# Altium PCB TH255A_MG32F003_TSSOP20_QFN20_EV_V10.PcbDoc (part 1 of 2)
Units mil, origin at the board's own origin, x right, y up, seen from the top; angles counter-clockwise.
Board outline 4094.49 x 2637.8 mil, 2 copper layers (Top Layer, Bottom Layer); 121 components, 89 nets, 513 pads, 230 vias.
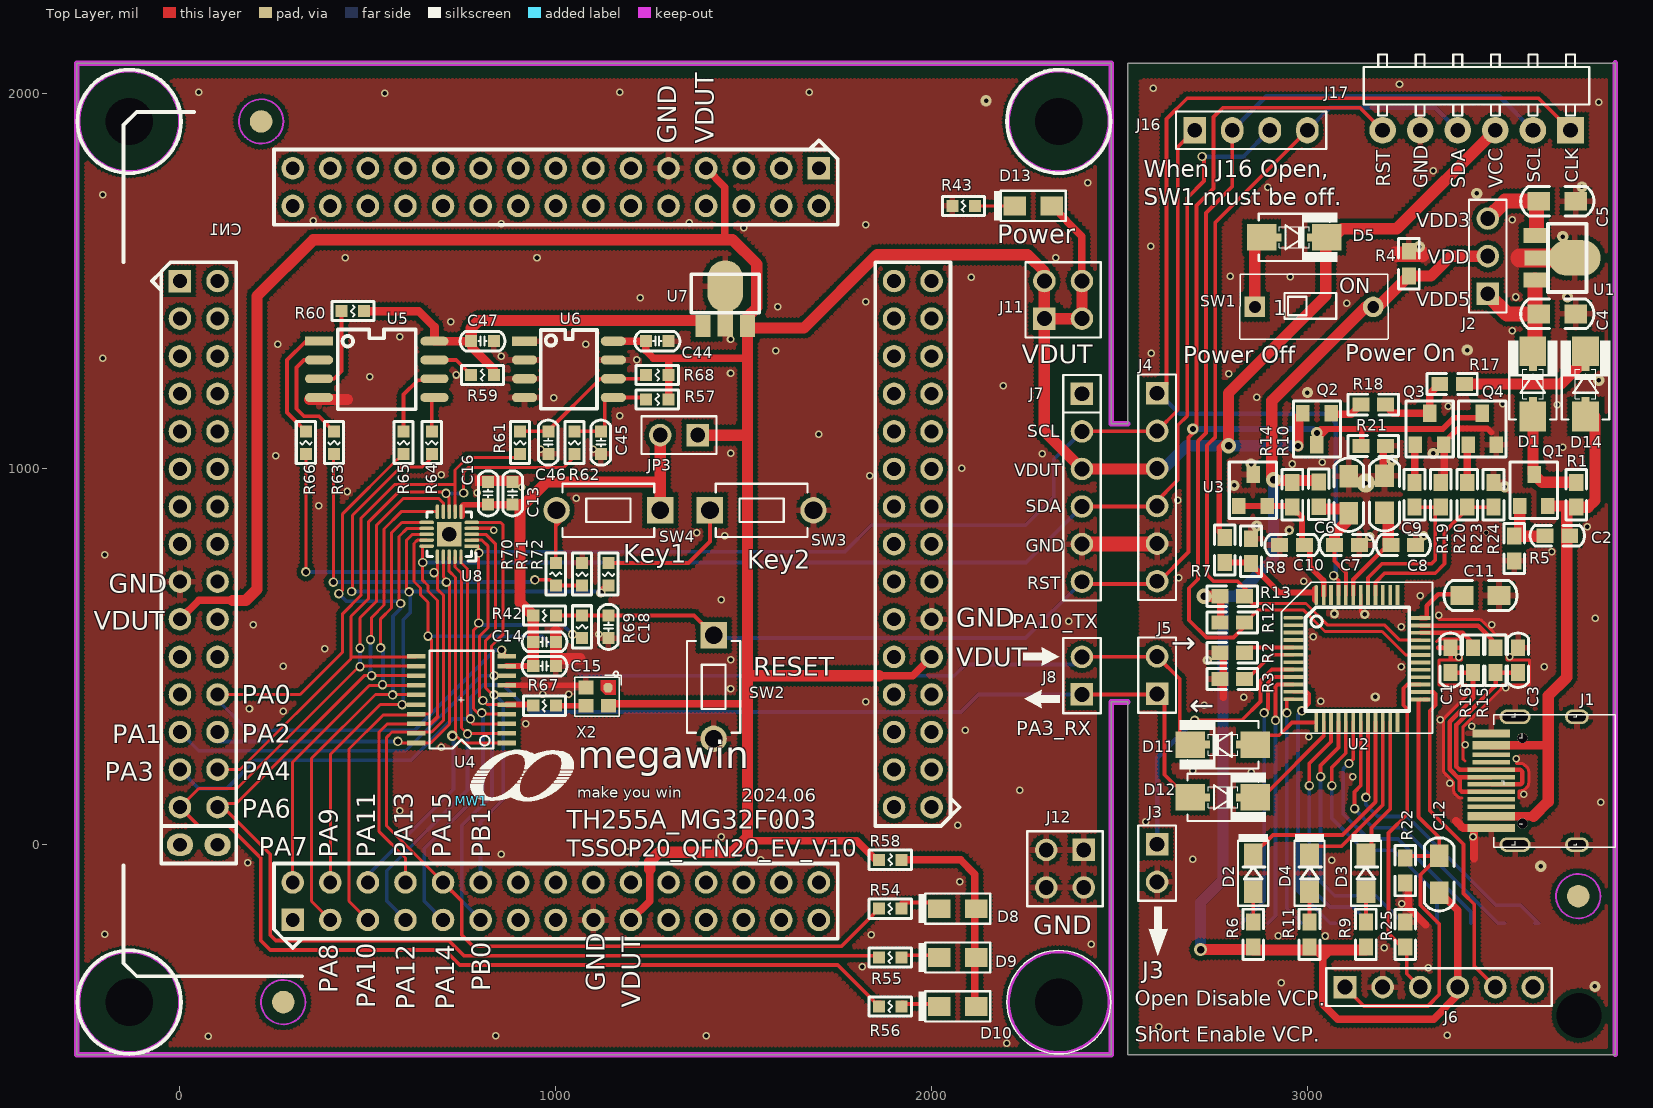
[diagram p0: Top Layer view]
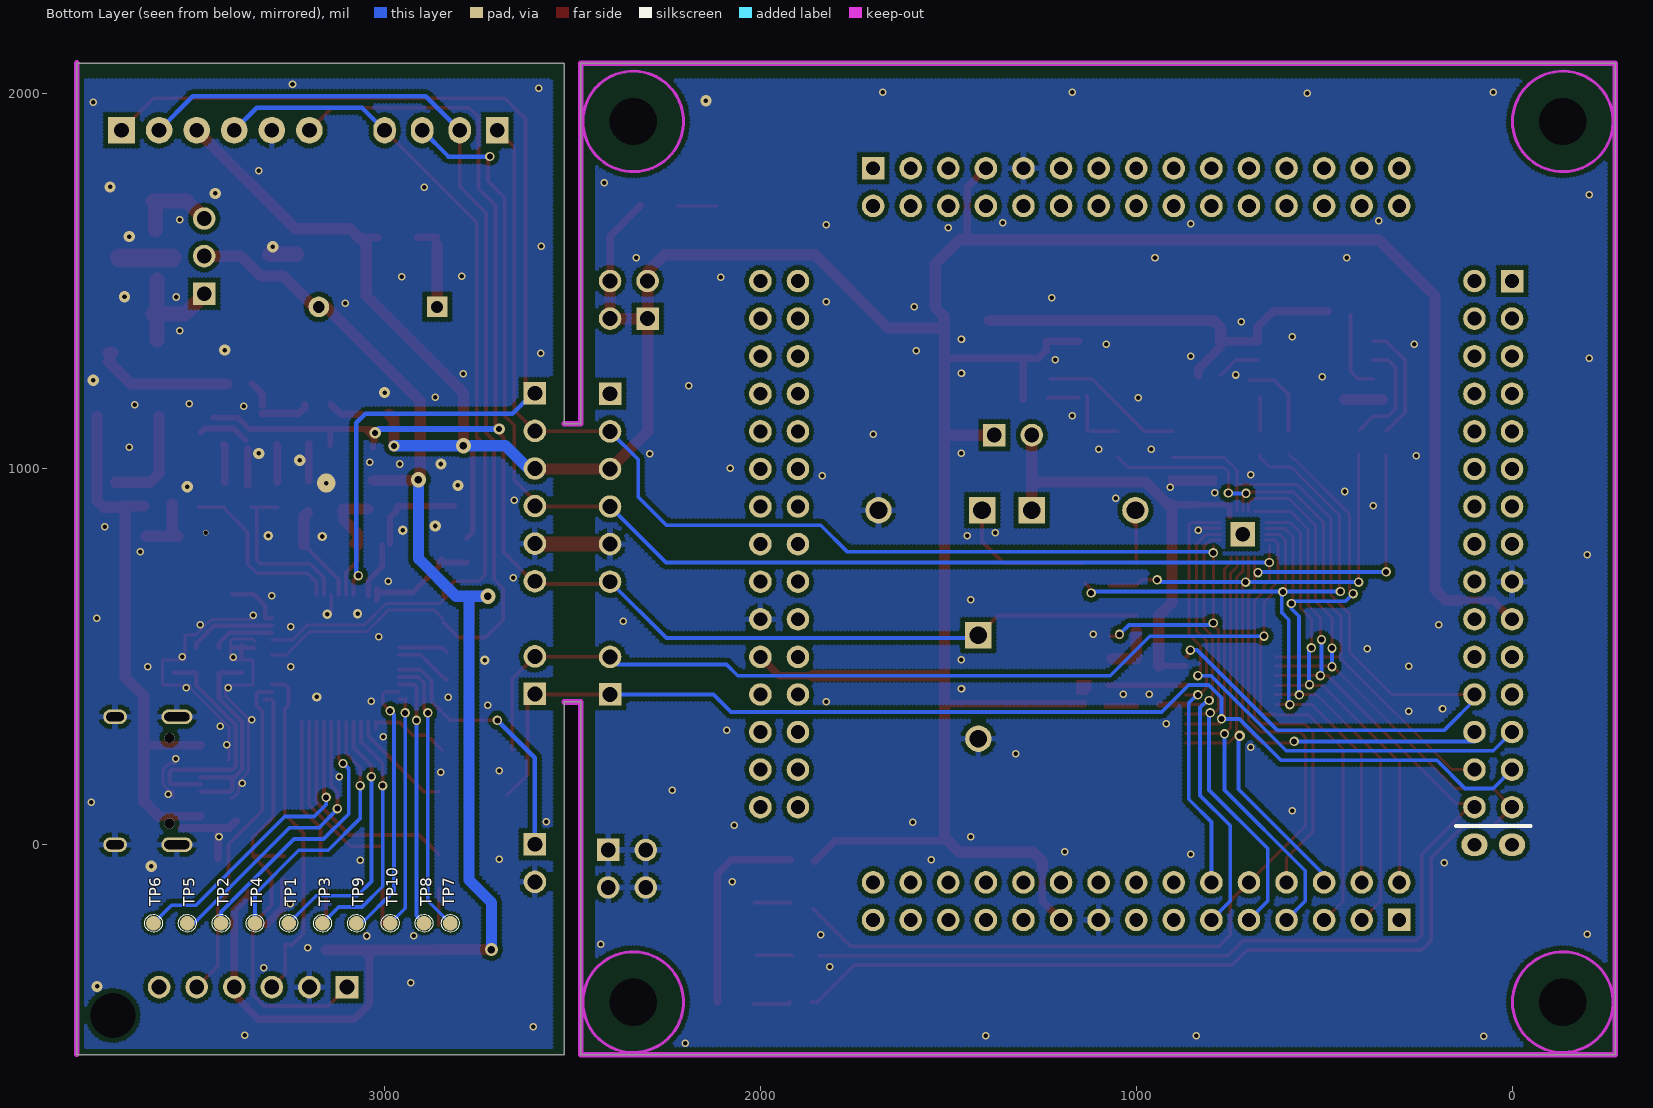
[diagram p1: Bottom Layer view, seen from below]

## Layer stack, top to bottom
Top Layer: signal copper 1.4
Dielectric: dielectric 12.6, FR-4, Dk 4.8
Bottom Layer: signal copper 1.4

## Board outline
-275.04,-558.74 -275.04,2079.06 2478.35,2079.06 2478.35,1120 2521.65,1120 2521.65,2079.06 3819.45,2079.06 3819.45,-558.74 2521.65,-558.74 2521.65,380 2478.35,380 2478.35,-558.74

## Design rules (kind name [scope] priority, off if disabled: settings)
Clearance 12 [All] p1 off: gap=12
Clearance 7 [All] p2 off: gap=7
Clearance 6 [All] p3: gap=6
HoleSize 500-HoleSize [All] p1: absolutevalues=TRUE maxlimit=1500 minlimit=1 maxpercent=80.000 minpercent=20.000
PolygonConnect VIA [ISVIA] p1: connectstyle=Direct reliefconductorwidth=10 reliefentries=4 polygonreliefangle="90 Angle"
PolygonConnect "15 PolygonConnect" [All] p2: connectstyle=Relief reliefconductorwidth=15 reliefentries=4 polygonreliefangle="90 Angle"
RoomDefinition "3_MG32F003_QFN20 " [InComponentClass('3_MG32F003_QFN20 ')] p1: confinementstyle=ConfineIn formatcopy=TRUE lockcomponents=FALSE outline -346,-819 3733,-819 3733,2359 -346,2359
RoomDefinition 2_MG32F003_TSSOP20 [InComponentClass('2_MG32F003_TSSOP20')] p2: confinementstyle=ConfineIn formatcopy=TRUE lockcomponents=FALSE outline -465.04,-733.74 3965,-733.74 3965,2151.26 -465.04,2151.26
RoomDefinition 1_MLink_V13 [InComponentClass('1_MLink_V13')] p3: confinementstyle=ConfineIn formatcopy=TRUE lockcomponents=FALSE outline -385.04,-778.74 3904.96,-778.74 3904.96,2216.26 -385.04,2216.26
RoutingVias [All] p1: holewidth=16 width=25 viastyle="Through Hole" minholewidth=12 minwidth=25 maxholewidth=28 maxwidth=50
ShortCircuit [All] p1 off: allowed=FALSE
SilkscreenOverComponentPads [All] p1: minsilkscreentomaskgap=10
SolderMaskExpansion [All] p1: expansion=4
UnRoutedNet [All] p1 off:
Width [All] p1: maxlimit=100 minlimit=6 preferedwidth=8
24 further rules are at their usual default settings.

## Classes and differential pairs
component class "3_MG32F003_QFN20 ": C13 C16 U8
component class 1_MLink_V13: C1 C2 C3 C4 C5 C6 C7 C8 C9 C10 C11 C12 D1 D2 D3 D4 D5 D11 D12 D14 J1 J2 J3 J4 J5 J6 J16 J17 MW1 Q1 Q2 Q3 Q4 R1 R2 R3 R4 R5 R6 R7 R8 R9 R10 R11 R12 R13 R14 R15 R16 R17 R18 R19 R20 R21 R22 R23 R24 R25 SW1 TP1 TP2 TP3 TP4 TP5 TP6 TP7 TP8 TP9 TP10 U1 U2 U3
component class 2_MG32F003_TSSOP20: C14 C15 C18 C44 C45 C46 C47 CN1 D8 D9 D10 D13 J7 J8 J11 J12 JP3 R42 R43 R54 R55 R56 R57 R58 R59 R60 R61 R62 R63 R64 R65 R66 R67 R68 R69 R70 R71 R72 SW2 SW3 SW4 U4 U5 U6 U7 X2

## Components (designator, comment, footprint, x,y, rotation, side; value= is the part's Value field where it differs from the comment)
C1 "15pF" 0603C 3380.55,491.26 r270 top
C2 "0.1uF" 0603C 3664.96,822.52 r0 top
C3 "15pF" 0603C 3560.55,491.26 r270 top
C4 "4.7uF" 0805C 3664.96,1412.52 r0 top
C5 "4.7uF" 0805C 3664.96,1712.52 r0 top
C6 "4.7uF" 0805C 3109.96,931.26 r90 top
C7 "0.1uF" 0603C 3105,797.52 r0 top
C8 "0.1uF" 0603C 3255,797.52 r0 top
C9 "4.7uF" 0805C 3204.96,932.52 r90 top
C10 "0.1uF" 0603C 2959.05,797.52 r0 top
C11 "4.7uF" 0805C 3460.55,663.16 r0 top
C12 "4.7uF" 0805C 3350.55,-78.74 r90 top
C13 "10uF" C-0603 885,935 r90 top
C14 "10uF" C-0603 970,540 r0 top
C15 "0.1uF" C-0603 970,475.6 r0 top
C16 "0.1uF" C-0603 820,935 r90 top
C18 "NC" C-0603 1140,580 r90 top
C44 "0.1uF" C-0603 1270,1340 r0 top
C45 "47pF" C-0603 1120,1070 r270 top
C46 "47pF" C-0603 980,1070 r270 top
C47 "0.1uF" C-0603 805,1340 r0 top
CN1 "QFP122-CKT" QFP122-P2.54-CKT 1000,800 r0 top locked
D1 "1N5817" DIODE_SMA_SOD323 3599.96,1226.26 r90 top
D2 "Yellow" 0805D 2855.55,-75.48 r90 top
D3 "Green" 0805D 3155.55,-75.48 r90 top
D4 "Red" 0805D 3005.55,-75.48 r90 top
D5 "1N5817" DIODE_SMA_SOD323 2964.96,1616.26 r0 top
D8 "Red" 0805D 2069.21,-170 r180 top
D9 "Yellow" 0805D 2069.21,-300 r180 top
D10 "Green" 0805D 2069.21,-430 r180 top
D11 "1N5817" DIODE_SMA_SOD323 2775,266.26 r180 top
D12 "1N5817" DIODE_SMA_SOD323 2775,126.26 r0 top
D13 "Yellow" 0805D 2270,1700 r180 top
D14 "1N5817" DIODE_SMA_SOD323 3739.96,1226.26 r90 top
J1 "CJ-USB3-C16P" USB_CF_16_SMD 3524.24,170.38 r90 top
J2 "2&3 (0 ohm)" PS3P254 3480,1466.26 r90 top
J3 "VCP Option" PS2P254 2600,1.26 r270 top
J4 "OnBoard ICP/SWD Connector" PS6P254 2600,1201.26 r270 top
J5 "NC" PS2P254 2600,401.26 r90 top
J6 "CON6" PS6P254 3100,-378.74 r0 top
J7 "CON6" PS6P254 2400,1200 r270 top locked
J8 "NC" PS2P254 2400,400 r90 top
J11 "CONN SOCKET 2x2/SM" PS2X2P254 2300,1400 r0 top
J12 "CONN SOCKET 2x2/SM" PS2X2P254 2404.96,-13.74 r180 top
J16 "When J16 Open, SW1 must be off." PS4P254 2700,1901.26 r0 top
J17 "Off Board ICP/SWD Connector" PS6P254_90 3700,1901.26 r180 top
JP3 "JUMPER" PS2P254 1377.79,1090 r180 top
MW1 "MW-A4" MEGAWIN_3.4_1 776.1,116.1 r0 top
Q1 "IRLML6402" SOT23 3602.5,943.23 r0 top
Q2 "2N3906" SOT23 3025.46,1106.26 r180 top
Q3 "3904" SOT23_132 3325,1106.26 r0 top
Q4 "3904" SOT23_132 3465,1106.26 r0 top
R1 "NC" 0603R 3715,931.26 r270 top
R2 "0" 0603R 2800,511.26 r0 top
R3 "NC" 0603R 2800,441.26 r0 top
R4 "3.3K" 0603R 3270,1546.26 r270 top
R5 "1M" 0603R 3550,788.26 r270 top
R6 "1K" 0603R 2855.55,-238.48 r270 top
R7 "30K" 0603R 2780,784.26 r90 top
R8 "10K" 0603R 2850,781.26 r270 top
R9 "1K" 0603R 3155.55,-238.48 r270 top
R10 "10" 0603R 3029.96,932.52 r90 top
R11 "1K" 0603R 3005.55,-238.48 r270 top
R12 "1.5K" 0603R 2800,591.26 r180 top
R13 "1.5K" 0603R 2800,661.26 r180 top
R14 "1K" 0603R 2959.96,931.26 r270 top
R15 "30" 0603R 3500.55,491.26 r90 top
R16 "30" 0603R 3440.55,491.26 r90 top
R17 "4.7K" 0603R 3384.96,1226.26 r0 top
R18 "1K" 0603R 3175,1171.26 r0 top
R19 "4.7K" 0603R 3285,931.26 r270 top
R20 "10K" 0603R 3355,931.26 r270 top
R21 "1M" 0603R 3175,1061.26 r180 top
R22 "47K" 0603R 3260.55,-68.74 r270 top
R23 "4.7K" 0603R 3425,931.26 r270 top
R24 "10K" 0603R 3495,931.26 r270 top
R25 "47K" 0603R 3260.55,-238.74 r270 top
R42 "47K" R-0603 970,610 r0 top
R43 "1K" R-0603 2085,1700 r0 top
R54 "470" R-0603 1890,-170 r0 top
R55 "470" R-0603 1890,-300 r0 top
R56 "470" R-0603 1890,-430 r0 top
R57 "10K" R-0603 1270,1185 r180 top
R58 "0" R-0603 1890,-40 r180 top
R59 "10K" R-0603 805,1250 r0 top
R60 "10K" R-0603 460,1420 r180 top
R61 "NC" R-0603 905,1070 r90 top
R62 "NC" R-0603 1050,1070 r90 top
R63 "NC" R-0603 410,1070 r90 top
R64 "NC" R-0603 670,1070 r90 top
R65 "NC" R-0603 595,1070 r90 top
R66 "NC" R-0603 335,1070 r90 top
R67 "NC" R-0603 970,370 r0 top
R68 "10K" R-0603 1270,1250 r180 top
R69 "NC" R-0603 1070,580 r90 top
R70 "-" R-0603 1000,720 r270 top
R71 "-" R-0603 1070,720 r90 top
R72 "-" R-0603 1140,720 r90 top
SW1 "SW KEY-SPST" DIP2_SW 2860.04,1431.26 r0 top
SW2 "SW TACT-SPST" SW_T_2P 1420,420 r270 top
SW3 "Key2" SW_T_2P 1547.79,890 r0 top
SW4 "Key1" SW_T_2P 1140,890 r180 top
TP1 "T POINT A" PIN1_1H0 3255,-208.74 r90 bottom
TP2 "T POINT A" PIN1_1H0 3435,-208.74 r90 bottom
TP3 "T POINT A" PIN1_1H0 3165,-208.74 r180 bottom
TP4 "T POINT A" PIN1_1H0 3345,-208.74 r180 bottom
TP5 "T POINT A" PIN1_1H0 3525,-208.74 r180 bottom
TP6 "T POINT A" PIN1_1H0 3615,-208.74 r180 bottom
TP7 "T POINT A" PIN1_1H0 2825,-208.74 r180 bottom
TP8 "T POINT A" PIN1_1H0 2895,-208.74 r180 bottom
TP9 "T POINT A" PIN1_1H0 3075,-208.74 r180 bottom
TP10 "T POINT A" PIN1_1H0 2985,-208.74 r90 bottom
U1 "AIC1734-33(SOT-89)" SOT89 3604.96,1561.57 r270 top
U2 "MG84FG516_LQFP48" LQFP48_7X7_050 3131.47,495.65 r270 top
U3 "TL431A" SOT23 2854.96,943.23 r0 top
U4 "MG32F003_TSSOP20" TSSOP20_170P065 869,270.8 r90 top locked
U5 "MX25L3206E" SO8_208P127 523.54,1265 r270 top
U6 "24C16-SOP8" SO8_150P127 916.89,1340 r0 top
U7 "AIC1734-33(SOT-89)" SOT89 1450.94,1380 r0 top
U8 "MG32F003_QFN20  3x3P0.4mm" QFN20_3X3P040_1 716.37,826.22 r90 top
X2 "OT20168MJBA4SL" OSC_2.0X1.6_SMD 1110,394.19 r180 top

## Footprints (in the part's own frame and the unit in brackets; to place one, negate y for a bottom-side part, rotate by r counter-clockwise, add the part's x,y. Pads: shape width x height; smd on the part's side, far side on the other; paste and mask are expansions set on the pad)
0603C [mil]
  rect 45x38 smd: 1(33,0) 2(-33,0)
  silkscreen extent -72,-28 72,28
0603R [mil]
  rect 45x38 smd: 1(33,0) 2(-33,0)
  silkscreen extent -67,-28 67,28
0805C [mil]
  rect 60x50 smd: 1(-49.21,0) 2(49.21,0)
  silkscreen extent -97,-39 97,39
0805D [mil]
  rect 60x50 smd: 1(-49.21,0) 2(49.21,0)
  silkscreen extent -87,-40 104,40
C-0603 [mil]
  rect 32x32 smd: 1(-30,0) 2(30,0)
  silkscreen extent -60,-26 60,26
DIODE_SMA_SOD323 [mm]
  rect 2x1.8 smd: 1(-2.2,0) 2(2.2,0)
  rect 0.95x0.54 smd: 1(-1.35,0) 2(1.35,0)
  silkscreen extent -2.4,-1.68 2.92,1.68
DIP2_SW [mm]
  rect 1.4x1.4 hole 0.8: 1(0,0)
  round 1.4 hole 0.8: 2(8,0)
  silkscreen extent -1.02,-2.2 9.02,2.2
LQFP48_7X7_050 [mm]
  oval 0.254x1.35 smd: 1(-2.75,-4.292)
  rect 0.254x1.35 smd: 2(-2.25,-4.292) 3(-1.75,-4.292) 4(-1.25,-4.292) 5(-0.75,-4.292) 6(-0.25,-4.292) 7(0.25,-4.292) 8(0.75,-4.292) 9(1.25,-4.292) 10(1.75,-4.292) 11(2.25,-4.292) 12(2.75,-4.292) 25(2.763,4.292) 26(2.263,4.292) 27(1.763,4.292) 28(1.263,4.292) 29(0.763,4.292) 30(0.263,4.292) 31(-0.237,4.292) 32(-0.737,4.292) 33(-1.237,4.292) 34(-1.737,4.292) 35(-2.237,4.292) 36(-2.737,4.292)
  rect 1.35x0.254 smd: 13(4.286,-2.744) 14(4.286,-2.244) 15(4.286,-1.744) 16(4.286,-1.244) 17(4.286,-0.744) 18(4.286,-0.244) 19(4.286,0.256) 20(4.286,0.756) 21(4.286,1.256) 22(4.286,1.756) 23(4.286,2.256) 24(4.286,2.756) 37(-4.286,2.756) 38(-4.286,2.256) 39(-4.286,1.756) 40(-4.286,1.256) 41(-4.286,0.756) 42(-4.286,0.256) 43(-4.286,-0.244) 44(-4.286,-0.744) 45(-4.286,-1.244) 46(-4.286,-1.744) 47(-4.286,-2.244)
  oval 1.35x0.254 smd: 48(-4.286,-2.744)
  silkscreen extent -5.15,-5.09 5.05,5.11
MEGAWIN_3.4_1 [mil]
  silkscreen extent -2,0 272,135
OSC_2.0X1.6_SMD [mil]
  oct 25x25 smd: 1(-29,-24)
  rect 40x37 smd: 2(30,-24.19) 3(30,24.19) 4(-30,24.19)
  Top Layer region: -50,-43 -50,-5 -21,-5 -9,-17 -9,-43
  silkscreen extent -64,-67 60,52
PIN1_1H0 [mm]
  round 1 smd: 1(0,0)
  silkscreen extent -0.6,-0.6 0.6,0.6
PS2P254 [mil]
  rect 60x60 hole 39.37: 1(0,0)
  round 60 hole 39.37: 2(100,0)
  silkscreen extent -50,-50 150,50
PS2X2P254 [mil]
  rect 60x60 hole 39.37: 1(0,0)
  round 60 hole 39.37: 2(0,100) 3(100,0) 4(100,100)
  silkscreen extent -50,-50 150,150
PS3P254 [mil]
  rect 60x60 hole 39.37: 1(0,0)
  round 60 hole 39.37: 2(100,0) 3(200,0)
  silkscreen extent -50,-50 250,50
PS4P254 [mil]
  rect 60x70 hole 39.37: 1(0,0)
  oval 60x70 hole 39.37: 2(100,0) 3(200,0) 4(300,0)
  silkscreen extent -50,-50 350,50
PS6P254 [mil]
  rect 60x60 hole 39.37: 1(0,0)
  round 60 hole 39.37: 2(100,0) 3(200,0) 4(300,0) 5(400,0) 6(500,0)
  silkscreen extent -50,-50 550,50
PS6P254_90 [mm]
  rect 1.8x1.8 hole 1: 1(0,0)
  round 1.8 hole 1: 2(2.54,0) 3(5.08,0) 4(7.62,0) 5(10.16,0) 6(12.7,0)
  silkscreen extent -1.27,-5.11 13.97,-1
QFN20_3X3P040_1 [mil]
  rect 64.96x64.96 hole 39.37: 0(0,0)
  rect 9x39.37 smd: 1(-31.5,-60)
  oval 9x39.37 smd: 2(-15.75,-60) 3(0,-60) 4(15.75,-60) 5(31.5,-60) 11(31.5,60) 12(15.75,60) 13(0,60) 14(-15.75,60) 15(-31.5,60)
  oval 39.37x9 smd: 6(60,-31.5) 7(60,-15.75) 8(60,0) 9(60,15.75) 10(60,31.5) 16(-60,31.5) 17(-60,15.75) 18(-60,0) 19(-60,-15.75) 20(-60,-31.5)
  silkscreen extent -71,-71 59,59
QFP122-P2.54-CKT [mil]
  rect 60x60 hole 37: 1(-700,-1000) 61(700,1000) 91(-1000,700)
  round 60 hole 37: 2(-700,-900) 3(-600,-1000) 4(-600,-900) 5(-500,-1000) 6(-500,-900) 7(-400,-1000) 8(-400,-900) 9(-300,-1000) 10(-300,-900) 11(-200,-1000) 12(-200,-900) 13(-100,-1000) 14(-100,-900) 15(0,-1000) 16(0,-900) 17(100,-1000) 18(100,-900) 19(200,-1000) 20(200,-900) 21(300,-1000) 22(300,-900) 23(400,-1000) 24(400,-900) 25(500,-1000) 26(500,-900) 27(600,-1000) 28(600,-900) 29(700,-1000) 30(700,-900) 31(1000,-700) 32(900,-700) 33(1000,-600) 34(900,-600) 35(1000,-500) 36(900,-500) 37(1000,-400) 38(900,-400) 39(1000,-300) 40(900,-300) 41(1000,-200) 42(900,-200) 43(1000,-100) 44(900,-100) 45(1000,0) 46(900,0) 47(1000,100) 48(900,100) 49(1000,200) 50(900,200) 51(1000,300) 52(900,300) 53(1000,400) 54(900,400) 55(1000,500) 56(900,500) 57(1000,600) 58(900,600) 59(1000,700) 60(900,700) 62(700,900) 63(600,1000) 64(600,900) 65(500,1000) 66(500,900) 67(400,1000) 68(400,900) 69(300,1000) 70(300,900) 71(200,1000) 72(200,900) 73(100,1000) 74(100,900) 75(0,1000) 76(0,900) 77(-100,1000) 78(-100,900) 79(-200,1000) 80(-200,900) 81(-300,1000) 82(-300,900) 83(-400,1000) 84(-400,900) 85(-500,1000) 86(-500,900) 87(-600,1000) 88(-600,900) 89(-700,1000) 90(-700,900) 92(-900,700) 93(-1000,600) 94(-900,600) 95(-1000,500) 96(-900,500) 97(-1000,400) 98(-900,400) 99(-1000,300) 100(-900,300) 101(-1000,200) 102(-900,200) 103(-1000,100) 104(-900,100) 105(-1000,0) 106(-900,0) 107(-1000,-100) 108(-900,-100) 109(-1000,-200) 110(-900,-200) 111(-1000,-300) 112(-900,-300) 113(-1000,-400) 114(-900,-400) 115(-1000,-500) 116(-900,-500) 117(-1000,-600) 118(-900,-600) 119(-1000,-700) 120(-900,-700)
  oval 70x60 hole 37: 121(-1000,-800) 122(-900,-800)
  silkscreen extent -1150,-1150 1075,1150
R-0603 [mil]
  rect 32x32 smd: 1(-30,0) 2(30,0)
  silkscreen extent -56,-26 56,26
SO8_150P127 [mil]
  rect 67x25 smd: 1(0,0)
  oval 67x25 smd: 2(0,-50) 3(0,-100) 4(0,-150) 5(236.22,-150) 6(236.22,-100) 7(236.22,-50) 8(236.22,0)
  silkscreen extent 43,-180 193,30
SO8_208P127 [mm]
  rect 0.6x1.9 smd: 1(-1.905,-3.9)
  oval 0.6x1.9 smd: 2(-0.635,-3.9) 3(0.635,-3.9) 4(1.905,-3.9) 5(1.905,3.9) 6(0.635,3.9) 7(-0.635,3.9) 8(-1.905,3.9)
  silkscreen extent -2.69,-2.63 2.69,2.63
SOT23 [mil]
  rect 36x43.31 smd: 1(-37.5,-41.97) 2(37.5,-41.97)
  rect 36x46.06 smd: 3(0.5,41.97)
  silkscreen extent -63,-74 63,75
SOT23_132 [mil]
  rect 36x43.31 smd: 1(-37.5,-41.97) 3(37.5,-41.97)
  rect 36x46.06 smd: 2(0.5,41.97)
  silkscreen extent -63,-74 63,75
SOT89 [mm]
  rect 1.016x1.5 smd: 1(-1.5,0) 3(1.5,0)
  oval 2.4x3.5 smd: 2(0,2.7)
  rect 1.016x2.6 smd: 2(0,0.6)
  silkscreen extent -2.3,0.9 2.3,3.5
SW_T_2P [mil]
  rect 70x70 hole 47.24: 1(-137.79,0)
  round 70 hole 47.24: 2(137.8,0)
  silkscreen extent -122,-71 122,71
TSSOP20_170P065 [mil]
  rect 12x49 smd: 1(0,0) 2(25.6,0) 3(51.2,0) 4(76.8,0) 5(102.4,0) 6(128,0) 7(153.6,0) 8(179.2,0) 9(204.8,0) 10(230.4,0) 11(230.4,240.16) 12(204.8,240.16) 13(179.2,240.16) 14(153.6,240.16) 15(128,240.16) 16(102.4,240.16) 17(76.8,240.16) 18(51.2,240.16) 19(25.6,240.16) 20(0,240.16)
  silkscreen extent -15,35 245,205
USB_CF_16_SMD [mm]
  rect 0.55x3.2 smd: A1(-3.2,0.9) A4(-2.4,0.9)
  rect 0.3x3.2 smd: A5(-1.25,0.9) A6(-0.25,0.9) A7(0.25,0.9) B6(0.75,0.9) B7(-0.75,0.9) B8(-1.75,0.9)
  rect 0.3x2.54 smd: A8(1.25,0.9) B5(1.75,0.9)
  rect 0.55x2.54 smd: A9(2.4,0.9) A12(3.2,0.9)
  oval 1x2.1 hole 0.6 slot 1.7 at 90 deg: M1(-4.32,-0.718) M2(4.32,-0.718)
  oval 1x1.6 hole 0.6 slot 1.2 at 90 deg: M3(4.32,-4.898) M4(-4.32,-4.898)
  round 0.7 hole 0.7 unplated: M5(-2.89,-1.218) M6(2.89,-1.218)
  silkscreen extent -4.48,-7.5 4.55,0.74

## Part data
C1 C3 C7 C12 C13 C14 C15 C16 C18: library part "CAP NP_Dup1"
C2 C8 C10: library part "CAP NP"
C4 C5: library part "C NP"
C6 C9 C11: library part CAP
C44 C45 C46 C47: library part CAP-NP
D1 D5 D11 D12 D14: library part "DIODE SCHOTTKY"
D2 D3 D4: library part Led0_0
D8 D9 D10 D13: library part LED
J1: "TPYE-C-9"
J2: library part CON3
J3 J5 J8: library part CON2
J4 J17: library part CON6
J7: library part CON6_Dup1
J16: library part CON4
MW1: library part MW_A4_2
Q1: library part "MOSFET P GSD"
Q2: library part 2N3906_0
Q3 Q4: library part "NPN BCE"
R1 R2 R3 R4 R43 R54 R55 R56 R58: library part R_Dup4
R5 R6 R7 R8 R9 R11 R12 R13 R17 R18 R19 R22 R23 R25: library part R_Dup2
R10 R14 R15 R16: library part R_Dup5
R20 R21 R24: library part R_Dup1
R42 R70 R71 R72: library part R_Dup3
R57 R59 R60 R61 R62 R63 R64 R65 R66 R67 R68 R69: library part R
SW3 SW4: library part "SW TACT-SPST"
U1 U7: library part AIC1722-33
U3: library part TL431/CYL
U6: library part ICM-24CXX
U8: library part MG32F003_QFN20
X2: library part OSC8_0

## Free pads (board coordinates)
  round 120 hole 125.98 unplated: 0(-135.04,-418.74) 0(-135.04,1924.68) 0(2338.35,-418.74) 0(2338.35,1924.68)
  round 60 smd mask+39.37: 0(215.96,1924.68) 0(274.96,-418.74) 0(3720.55,-136.84)
  round 100 hole 120 unplated: 0(3722.76,-454.09)

## Via types
v1: diameter 20, hole 12, Top Layer to Bottom Layer, tented top, 135 vias
v2: diameter 25, hole 16, Top Layer to Bottom Layer, tented top, 45 vias
v3: diameter 30, hole 12, Top Layer to Bottom Layer, tented top, 17 vias
v4: diameter 20, hole 12, Top Layer to Bottom Layer, tented both sides, 15 vias
v5: diameter 25, hole 12, Top Layer to Bottom Layer, tented top, 7 vias
v6: diameter 30, hole 16, Top Layer to Bottom Layer, tented top, 3 vias
v7: diameter 40, hole 20, Top Layer to Bottom Layer, tented top, 3 vias
v8: diameter 28, hole 16, Top Layer to Bottom Layer, tented top, 1 vias
v9: diameter 15, hole 12, Top Layer to Bottom Layer, tented top, 1 vias
v10: diameter 35, hole 20, Top Layer to Bottom Layer, tented top, 1 vias
v11: diameter 50, hole 12, Top Layer to Bottom Layer, tented top, 1 vias
v12: diameter 25, hole 16, Top Layer to Bottom Layer, tented both sides, 1 vias

## Nets (pads, with @x,y where several pads share a name; then routed paths per layer and width w, separated by ;. In a path a pad name is that pad's centre, name@x,y a point inside that pad or via, vN(x,y) a via of type N, cw(c..) or ccw(c..) an arc to the next point about the centre after c; other vN are vias at no path point)
2.495V: C10.1 R14.1 U2.47 U3.1 U3.2 | length 416.4
  Top Layer w15: U3.1@2814.96,901.26 U3.1@2817.46,901.26 U3.2@2892.46,901.26 2959.96,901.26 R14.1@2964.96,901.26 ; R14.1@2960.55,897.26 R14.1@2970.55,887.26 ; R14.1@2970.55,883.26 R14.1@2970.55,887.26 ; R14.1@2970.55,893.26 R14.1@2970.55,887.26 ; C10.1@2985.55,800.26 2985.55,872.26 R14.1@2970.55,887.26 ; C10.1@3006.55,798.26 3006.55,797.52 3006.55,739.71 3043.14,703.12 U2.47@3043.14,664.39
516P24: TP7.1 U2.9 | length 742.8
  Top Layer w10: v2(2885,351.26) 2895,361.26 2895,431.26 2910.18,446.44 U2.9@2962.48,446.44
  Bottom Layer w10: TP7.1@2825,-208.74 2885,-148.74 v2(2885,351.26)
516P25: TP8.1 U2.10 | length 688
  Top Layer w10: v2(2915,331.26) 2915,421.26 2920.49,426.75 U2.10@2962.48,426.75
  Bottom Layer w10: TP8.1@2895,-208.74 2915,-188.74 v2(2915,331.26)
516P26: TP9.1 U2.11 | length 717
  Top Layer w10: U2.11@2962.48,407.07 2999.19,407.07 3005,401.26 3005,376.26 v2(2985,356.26)
  Bottom Layer w10: v2(2985,356.26) 2975,346.26 2975,-122.79 3060.95,-208.74 TP9.1@3075,-208.74
516P27: TP10.1 U2.12 | length 634.3
  Top Layer w10: v2(2945,351.26) 2945,384.49 2942.11,387.38 U2.12@2962.48,387.38
  Bottom Layer w10: v2(2945,351.26) 2945,-168.74 TP10.1@2985,-208.74
516P32: TP3.1 U2.15 | length 662
  Top Layer w10: v2@3005,156.26 v2(3005,157.52) 3005,216.26 3062.82,274.08 U2.15@3062.82,326.91
  Bottom Layer w10: v2@3005,156.26 3005,-110.36 3060.38,-165.74 3122,-165.74 TP3.1@3165,-208.74
516P33: TP1.1 U2.16 | length 710.4
  Top Layer w10: v2(3035,181.26) 3035,211.26 3082.51,258.77 U2.16@3082.51,326.91
  Bottom Layer w10: v2(3035,181.26) 3035,-97.94 3072.8,-135.74 3182,-135.74 TP1.1@3255,-208.74
516P34: TP4.1 U2.17 | length 713.1
  Top Layer w10: v2@3065,156.26 v2(3065,157.52) 3065,206.26 3102.19,243.45 U2.17@3102.19,326.91
  Bottom Layer w10: v2@3065,156.26 3065,69.96 3149.7,-14.74 3228.27,-14.74 3345,-131.47 TP4.1@3345,-208.74
516P35: TP2.1 U2.18 | length 733.6
  Top Layer w10: v2@3110.28,216.54 3121.88,228.14 U2.18@3121.88,326.91
  Bottom Layer w10: v2@3110.28,216.54 3095,201.26 3095,82.38 3162.12,15.26 3240.7,15.26 3435,-179.04 TP2.1@3435,-208.74
  other v2: 3110.55,216.26
516P36: TP5.1 U2.19 | length 774.1
  Top Layer w10: v2@3125,96.26 3125,140.71 3141.56,157.27 U2.19@3141.56,326.91
  Bottom Layer w10: v2@3125,96.26 3125,94.81 3174.55,45.26 3253.12,45.26 3507.12,-208.74 TP5.1@3525,-208.74 TP5.1@3515.55,-208.74
  other v2: 3125.55,96.26
516P37: TP6.1 U2.20 | length 822.9
  Top Layer w10: v2@3155,126.26 v2(3155.55,126.26) 3161.25,131.96 U2.20@3161.25,326.91
  Bottom Layer w10: v2@3155,126.26 3155,107.24 3186.98,75.26 3265.55,75.26 3501.55,-160.74 3567,-160.74 TP6.1@3615,-208.74 TP6.1@3605.55,-208.74
CHIP_VDD: C13.1 C14.1 C15.1 C16.1 JP3.2 R42.1 SW4.1 U4.9 U8.6 | length 1261.5
  Top Layer w15: U8.6@750.9,874.9 750.9,882.9 751.04,883.04 751.04,886.22 751.04,901.04 755,905 C16.1@820,905 840,905 ; U4.9@869,475.6 C15.1@940,475.6
  Top Layer w20: 840,905 C13.1@885,905
  Top Layer w30: 905,905 905,645 R42.1@940,610 C14.1@940,540 C15.1@940,475.6 ; 915,905 975,965 1275,965 ; SW4.1@1277.79,890 JP3.2@1277.79,1090
D+: C3.1 J1.A6 J1.B6 R15.2 | length 648.6
  Top Layer w12: J1.A6@3488.8,160.53 3567.33,160.53 3572.06,165.26 3572.06,194.26 3566.41,199.9 J1.B6@3488.8,199.9 3404.91,199.9 3396.55,208.26 3396.55,319.8 3500.55,423.8 R15.2@3500.55,458.26 C3.1@3560.55,458.26
D-: C1.1 J1.A7 J1.B7 R16.2 | length 590.1
  Top Layer w12: C1.1@3380.55,458.26 R16.2@3440.55,458.26 3440.55,389.26 3378.55,327.26 3378.55,200.8 3404.71,174.65 ; 3400.55,180.22 3410.96,180.22 ; 3405.55,175.49 3405.55,146.49 3411.19,140.85 J1.B7@3488.8,140.85 ; 3405.9,175.16 3410.96,180.22 ; J1.A7@3488.8,180.22 3410.96,180.22
DET_VDUT: R7.2 R8.1 U2.48 | length 318.6
  Top Layer w15: R7.2@2780,751.26 2850,751.26 R8.1@2857.56,751.26 ; R8.1@2847.56,761.26 R8.1@2855.28,753.54 ; R8.1@2847.76,748.49 2849,747.26 2925,671.26 3015.94,671.26 ; U2.48@3020,651.26 3020,664.39 U2.48@3020,681.26
DUT_CLK: J4.1 J17.1 U2.45 | length 2846.4
  Top Layer w10: J4.1@2600,1201.26 2625,1226.26 2625,1931.26 2680,1986.26 3615,1986.26 J17.1@3700,1901.26 ; v2(3069.88,716.26) 3082.51,703.63 U2.45@3082.51,664.39
  Bottom Layer w12: J4.1@2600,1201.26 2605,1201.26 2660,1146.26 3051.22,1146.26 3074.96,1122.52 3074.96,721.34 v2(3069.88,716.26)
DUT_RST: C18.2 J4.6 J7.6 J17.6 Q2.3 Q4.2 R21.1 R42.2 R69.2 SW2.1 | length 4498.8
  Top Layer w10: R42.2@1000,610 R69.2@1070,610 C18.2@1140,610 ; 1262.21,610 C18.2@1140,610 ; SW2.1@1420,557.79 1367.79,610 C18.2@1140,610 ; J7.6@2401,694 J4.6@2600,694 ; J4.6@2603,698.26 2683.75,779.01 2683.75,1084.01 2700.5,1100.76 2705,1105.26 2705,1106.26 2705,1701.26 2750,1746.26 2750,1936.26 2775,1961.26 3140,1961.26 J17.6@3200,1901.26
  Top Layer w15: Q2.3@3024.96,1076.26 Q2.3@3029.96,1081.26 ; v6(3024.96,1096.26) 3034.96,1106.26 3054.96,1106.26 ; Q2.3@3029.96,1056.26 3029.96,1064.29 Q2.3@3029.96,1081.26 ; v6@3029.96,1099.26 3029.96,1096.26 Q2.3@3029.96,1081.26 ; R21.1@3144.96,1063.26 3144.96,1106.26 ; Q4.2@3455.59,1136.26 3389.96,1136.26 3359.96,1106.26 3144.96,1106.26 ; Q2.3@3029.96,1081.26 3034.96,1086.26 3054.96,1106.26 ; 3054.96,1106.26 3144.96,1106.26
  Bottom Layer w10: SW2.1@1420,550 2250,550 J7.6@2400,700
  Bottom Layer w15: v6(2695,1106.26) 3014.96,1106.26 v6(3024.96,1096.26)
FAIL: D4.2 U2.22 | length 461.4
  Top Layer w10: D4.2@3005.55,-3.74 3090.84,-3.74 3200.62,106.04 U2.22@3200.62,326.91
ICP/SWD_SCL: J16.2 J17.2 R12.2 U2.31 | length 2959.9
  Top Layer w8: R12.2@2845,601.26 2869,625.26 2988.96,625.26 3046.96,567.26 3198.96,567.26 3238.86,527.36 ; 3238.9,527.36 3261.27,504.99 U2.31@3300.46,504.99
  Top Layer w10: J16.2@2800,1926.26 J16.2@2800,1901.26 2800,1751.26 2730,1681.26 2730,1095.26 2708.75,1074.01 2708.75,706.31 2684.96,682.52 2684.96,597.52 2731.22,551.26 2803,551.26 2838,586.26 R12.2@2843,591.26
  Bottom Layer w12: J16.2@2800,1901.26 2890,1991.26 3510,1991.26 J17.2@3600,1901.26
ICP/SWD_SDA: J16.4 J17.4 R13.2 U2.33 | length 2399.4
  Top Layer w8: R13.2@2833,661.26 2852,642.26 2996,642.26 3054,584.26 3206,584.26 3245.9,544.36 U2.33@3300.46,544.36
  Top Layer w10: R13.2@2843,661.26 2843,672.26 2814,701.26 2750,701.26 2732.75,718.51 2732.75,1063.01 2755,1085.26 2755,1656.26 J16.4@3000,1901.26
  Bottom Layer w12: J16.4@3000,1901.26 3060,1961.26 3340,1961.26 J17.4@3400,1901.26
MLINK_RXD: CN1.5 D11.2 J5.2 J8.2 U4.17 U8.14 | length 3570.1
  Top Layer w8: CN1.5@500,-200 450,-150 450,255 540,345 628.84,345 647.4,345 U4.17@650,347.6 ; U4.17@628.84,347.6 U4.17@650,347.6 ; U8.14@656.37,810.47 631.47,810.47 622.68,801.68 622.68,700.32 640,683 640,665 660,645 v2(660,555) 669,546 669,535 ; 669,505 669,535 ; U4.17@650,347.6 662.6,347.6 669,354 669,535
  Top Layer w10: J8.2@2400,500 J5.2@2600,500 ; J5.2@2600,501.26 2660,441.26 2660,266.26 D11.2@2660,251.26
  Bottom Layer w10: v2(660,555) 964,555 1069,450 2060,450 2090,480 2380,480 J8.2@2400,500
MLINK_TXD: CN1.117 D12.1 J5.1 J8.1 U4.3 U8.20 | length 3656.5
  Top Layer w8: U8.20@747.87,766.22 747.87,751.13 765,734 765,336 769.5,331.5 779,322 U4.3@869,322
  Top Layer w10: J8.1@2400,400 J5.1@2600,400 ; J5.1@2600,401.26 J5.1@2605.77,395.49 ; J5.1@2620,399.26 2620,186.26 D12.1@2673.39,132.87
  Bottom Layer w10: CN1.117@0,200 50,150 125.07,150 200,224.93 614.93,224.93 725,335 v2@769,335 ; v2(773,335) 773,391 807,425 860,425 932,353 2078,353 2125,400 J8.1@2400,400
NetC2_2: C2.2 Q1.1 R5.2 | length 170
  Top Layer w30: R5.2@3550,821.26 R5.2@3565,821.26 ; Q1.1@3565,906.26 Q1.1@3565,901.26 R5.2@3565,821.26 ; C2.2@3635,821.26 3631.96,821.26 R5.2@3565,821.26
NetC6_1: C6.1 C7.2 R10.2 U2.44 | length 312.7
  Top Layer w11: C7.2@3072,797.52 3072,754.81 3102.19,724.62 U2.44@3102.19,664.39 ; C7.2@3087.55,797.52 C7.2@3087.55,806.52
  Top Layer w30: R10.2@3045,893.26 3109.96,893.26 C6.1@3109.96,882.05 ; C7.2@3072,797.52 3072,827.71 C6.1@3108.55,864.26
NetC8_2: C8.2 C9.1 U2.43 | length 261.6
  Top Layer w11: U2.43@3121.88,664.39 3121.88,705.44 C8.2@3214.96,798.52
  Top Layer w30: C9.1@3204.96,883.31 3214.96,873.31 C8.2@3214.96,798.52
NetC11_1: C11.1 U2.36 | length 149.7
  Top Layer w12: U2.36@3300.46,603.42 3317.16,603.42 3317.16,635.94 3347.86,666.65 C11.1@3404.9,666.65
NetD1_1: D1.1 Q1.3 R1.2 | length 276.4
  Top Layer w30: D1.1@3599.96,1139.65 3599.96,988.24 Q1.3@3603,985.2 3623.94,964.26 R1.2@3715,964.26
NetD2_1: D2.1 R6.2 | length 97
  Top Layer w10: R6.2@2855.55,-213.74 R6.2@2855.55,-205.48 D2.1@2855.55,-124.69 D2.1@2855.55,-116.74
NetD3_1: D3.1 R9.2 | length 97
  Top Layer w10: R9.2@3155.55,-213.74 R9.2@3155.55,-205.48 D3.1@3155.55,-124.69 D3.1@3155.55,-116.74
NetD4_1: D4.1 R11.2 | length 97
  Top Layer w10: R11.2@3005.55,-213.74 R11.2@3005.55,-205.48 D4.1@3005.55,-124.69 D4.1@3005.55,-116.74
NetD5_1: D5.1 SW1.1 | length 215.1
  Top Layer w20: D5.1@2860.83,1616.26 D5.1@2878.35,1616.26 D5.1@2911.81,1616.26
  Top Layer w30: SW1.1@2860.04,1431.26 D5.1@2860.04,1595.39
NetD8_1: D8.1 D9.1 D10.1 R58.1 | length 550.6
  Top Layer w20: R58.1@1920,-40 2076.86,-40 2114.96,-78.1 2114.96,-170 2114.96,-300 D10.1@2114.96,-417.95
NetD8_2: D8.2 R54.2 | length 95.8
  Top Layer w10: 1920,-153.74 D8.2@2015.75,-153.74
NetD9_2: D9.2 R55.2 | length 95.8
  Top Layer w10: R55.2@1914.9,-293.74 1920,-293.74 D9.2@2010.69,-293.74
NetD10_2: D10.2 R56.2 | length 95.8
  Top Layer w10: R56.2@1921.54,-418.74 R56.2@1924.96,-418.74 ; R56.2@1924.9,-423.74 D10.2@2017.26,-423.74
NetD11_1: D11.1 U2.13 | length 209.6
  Top Layer w10: D11.1@2846.61,251.26 D11.1@2861.61,266.26 D11.1@2876.61,281.26 ; D11.1@2885,291.26 2925,291.26 2959.06,325.32 U2.13@3020.92,325.32 ; U2.13@3023.45,309.71 U2.13@3023.45,326.91
NetD12_2: D12.2 U2.14 | length 287
  Top Layer w10: D12.2@2855,141.26 2861.61,141.26 2895,141.26 3043.14,289.4 U2.14@3043.14,326.91
NetD13_2: D13.2 R43.2 | length 105.8
  Top Layer w8: R43.2@2115,1700 D13.2@2220.79,1700
NetD14_2: D14.2 R17.1 | length 348.7
  Top Layer w30: R17.1@3417.96,1226.26 3669.96,1226.26 ; 3674.96,1226.26 D14.2@3734.04,1285.33 ; D14.2@3723.11,1309.41 D14.2@3734.96,1309.41 ; D14.2@3729.04,1285.33 D14.2@3729.96,1286.26
NetQ2_1: Q2.1 R18.2 | length 89.8
  Top Layer w20: Q2.1@3062.96,1145.2 3115.94,1145.2 R18.2@3142,1171.26
NetQ3_1: Q3.1 R19.2 | length 117.1
  Top Layer w20: R19.2@3285,981.3 R19.2@3285,964.26 Q3.1@3285,1061.79 ; Q3.1@3287.5,1061.79 Q3.1@3287.5,1064.29
NetQ3_2: Q3.2 R17.2 R18.1 | length 192.7
  Top Layer w20: R18.1@3213,1171.26 3213,1163.22 3227.99,1148.23 Q3.2@3325.5,1148.23 ; 3325.5,1171.26 3325.5,1199.8 R17.2@3351.96,1226.26
NetQ4_1: Q4.1 R23.2 | length 100
  Top Layer w20: R23.2@3425,964.26 Q4.1@3425,1061.79 ; Q4.1@3427.5,1061.79 Q4.1@3427.5,1064.29